# Altium PCB urbanturbine_rev5.PcbDoc
Units mm, origin at the board's own origin, x right, y up, seen from the top; angles counter-clockwise.
Board outline 101.6 x 86.99 mm, 2 copper layers (Top Layer, Bottom Layer); 52 components, 48 nets, 213 pads, 0 vias.
Unrouted connection lines stored in the file: 105.
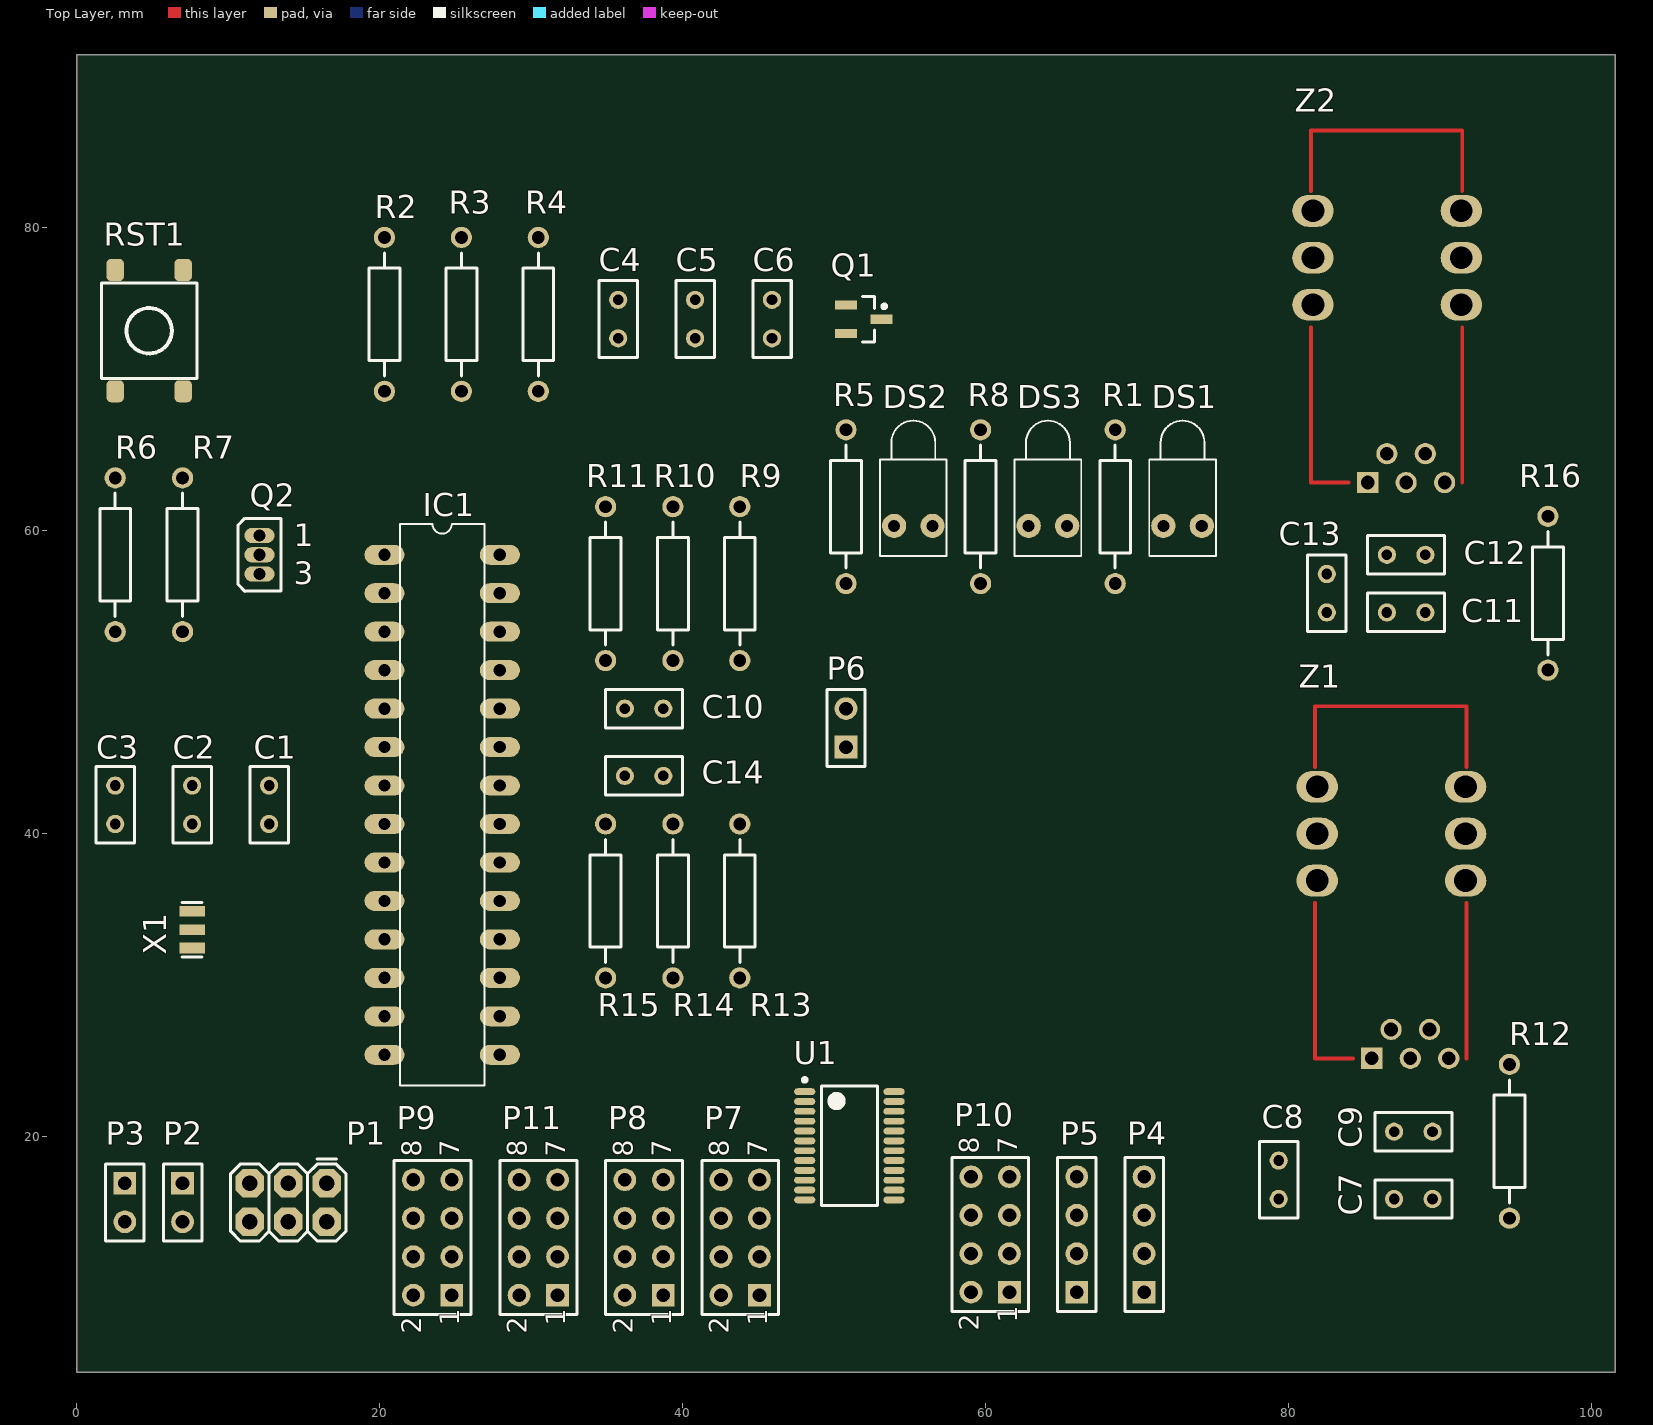
[diagram p0: Top Layer view]
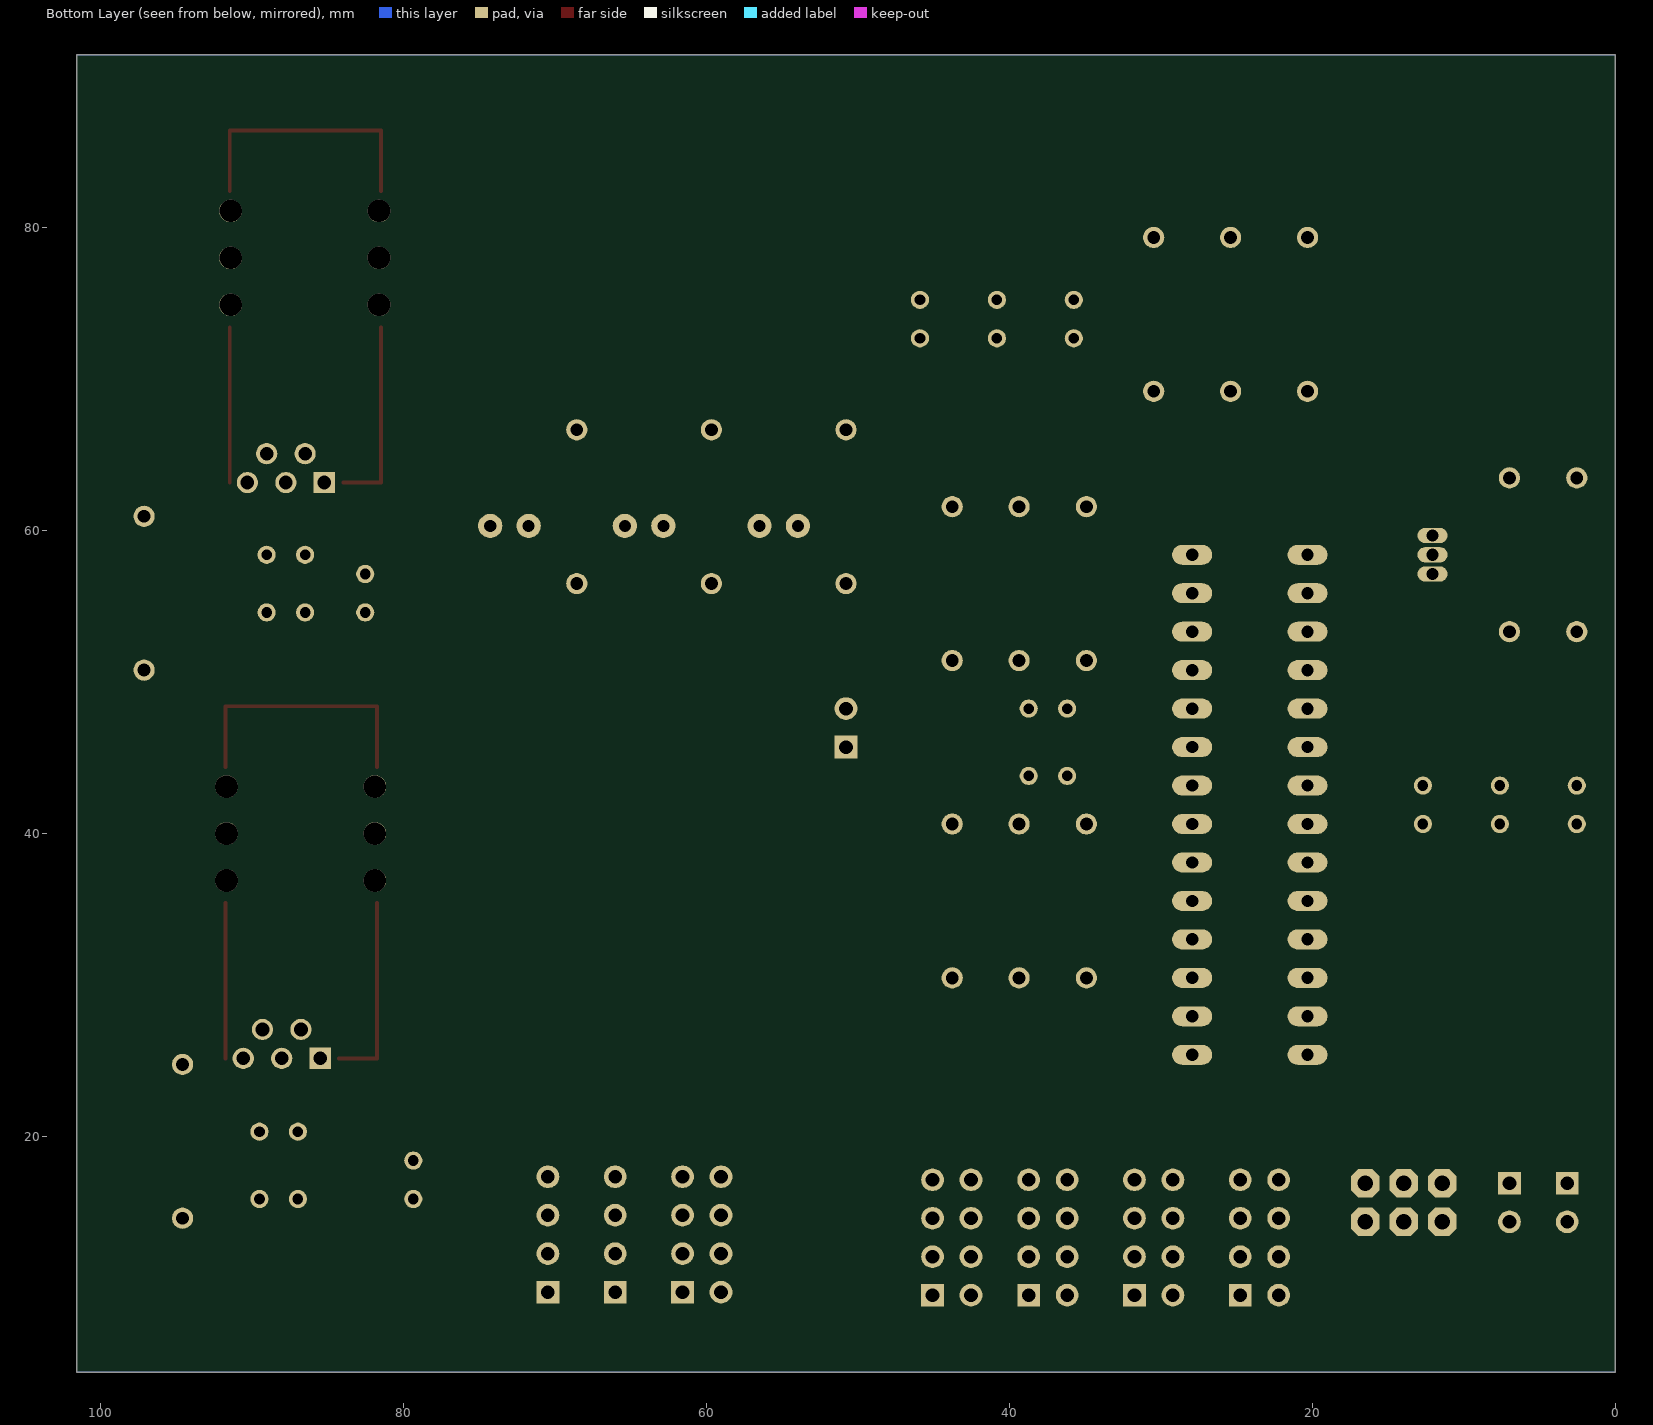
[diagram p1: Bottom Layer view, seen from below]

## Layer stack, top to bottom
Top Solder: solder mask 0.0102, Solder Resist, Dk 3.5
Top Layer: signal copper 0.0356
Dielectric 1: dielectric 0.32, FR-4, Dk 4.8
Bottom Layer: signal copper 0.0356
Bottom Solder: solder mask 0.0102, Solder Resist, Dk 3.5

## Board outline
0,4.445 101.6,4.445 101.6,91.44 0,91.44

## Design rules (kind name [scope] priority, off if disabled: settings)
Clearance [All] p1: gap=0.254 ignorepadtopadclearanceinfootprint=FALSE except(0: Arc-Hole Track-Hole SMDPad-Hole THPad-Hole Via-Hole Fill-Hole Poly-Hole Region-Hole Text-Hole)
PolygonConnect [All] p1: connectstyle=Relief reliefconductorwidth=0.254 reliefentries=4 polygonreliefangle="90 Angle" airgapwidth=0.254
RoutingVias [All] p1: holewidth=0.711 width=1.27 viastyle="Through Hole" minholewidth=0.711 minwidth=1.27 maxholewidth=0.711 maxwidth=1.27
SolderMaskExpansion [All] p1: expansion=0.102
Width [All] p1: maxlimit=0.635 minlimit=0.254 preferedwidth=0.254 minimp=50.000000 maximp=50.000000 favimp=50.000000
30 further rules are at their usual default settings.

## Classes and differential pairs
component class urbanturbine: C1 C2 C3 C4 C5 C6 DS1 DS2 DS3 IC1 P1 P2 P3 P4 P5 Q1 Q2 R1 R2 R3 R4 R5 R6 R7 R8 RST1 U1 X1
component class sensors: C7 C8 C9 C10 C11 C12 C13 C14 P6 R9 R10 R11 R12 R13 R14 R15 R16 Z1 Z2
component class displays: P7 P8 P9 P10 P11

## Components (designator, comment, footprint, x,y, rotation, side; value= is the part's Value field where it differs from the comment)
C1 "Cap Pol1" RAD-0.1 12.7,41.91 r270 top value=100pF
C2 "Cap Pol1" RAD-0.1 7.62,41.91 r270 top value=0.1uF
C3 "Cap Pol1" RAD-0.1 2.54,41.91 r270 top value=0.1uF
C4 "C1005X7R1H104K050BB" RAD-0.1 35.755,73.985 r90 top value=0.1uF
C5 "Cap" RAD-0.1 40.835,73.985 r270 top value=1uF
C6 "Cap" RAD-0.1 45.915,73.985 r270 top value=1uF
C7 "Cap" RAD-0.1 88.265,15.875 r180 top value=47uF
C8 "Cap" RAD-0.1 79.375,17.145 r90 top value=47uF
C9 "Cap" RAD-0.1 88.265,20.32 r180 top value=4.7uF
C10 "Cap" RAD-0.1 37.465,48.26 r180 top value=100nF
C11 "Cap" RAD-0.1 87.79,54.61 r180 top value=47uF
C12 "Cap" RAD-0.1 87.79,58.42 r0 top value=47uF
C13 "Cap" RAD-0.1 82.55,55.88 r270 top value=4.7uF
C14 "Cap" RAD-0.1 37.465,43.815 r180 top value=100nF
DS1 "LTST-C191KGKT" LED-1 73.025,60.325 r90 top
DS2 "LTST-C191KRKT" LED-1 55.245,60.325 r90 top
DS3 "LTST-C191KRKT" LED-1 64.135,60.325 r90 top
IC1 "ATMEGA328-PU" *DIL28 24.13,41.91 r0 top
P1 "M20-9980346" 2X3 16.51,16.91 r180 top
P2 "" HDR1X2 6.985,16.91 r270 top
P3 "" HDR1X2 3.175,16.91 r270 top
P4 "" HDR1X4 70.485,9.725 r90 top
P5 "" HDR1X4 66.04,9.725 r90 top
P6 "" HDR1X2 50.8,45.72 r90 top
P7 "" HDR2X4 45.085,9.525 r90 top
P8 "SPEED_DISP" HDR2X4 38.735,9.525 r90 top
P9 "TEMP_DISP" HDR2X4 24.765,9.525 r90 top
P10 "CRANK_DISP" HDR2X4 61.595,9.725 r90 top
P11 "HUMIDITY_DISP" HDR2X4 31.75,9.525 r90 top
Q1 "AP2138N-3.3TRG1" SOT23_M 51.975,73.975 r0 top
Q2 "MOSFET-N" E3 12.065,58.42 r0 top
R1 "RC0603JR-071KL" AXIAL-0.4 68.58,61.595 r90 top value=1k
R2 "Res1" AXIAL-0.4 20.32,74.295 r270 top value=1k
R3 "Res2" AXIAL-0.4 25.4,74.295 r90 top value=4.7k
R4 "Res2" AXIAL-0.4 30.48,74.295 r90 top value=4.7k
R5 "Res1" AXIAL-0.4 50.8,61.595 r90 top value=1k
R6 "ERJ-3EKF1002V" AXIAL-0.4 2.54,58.42 r270 top value=100
R7 "Res2" AXIAL-0.4 6.985,58.42 r270 top value=1M
R8 "Res1" AXIAL-0.4 59.69,61.595 r90 top value=1k
R9 "Res2" AXIAL-0.4 43.785,56.515 r270 top value=90k
R10 "Res2" AXIAL-0.4 39.37,56.515 r270 top value=10k
R11 "Res2" AXIAL-0.4 34.925,56.515 r90 top value=10
R12 "Res2" AXIAL-0.4 94.615,19.685 r270 top value=10k
R13 "Res2" AXIAL-0.4 43.785,35.56 r90 top value=90k
R14 "Res2" AXIAL-0.4 39.37,35.56 r90 top value=10k
R15 "Res2" AXIAL-0.4 34.925,35.56 r270 top value=10
R16 "Res2" AXIAL-0.4 97.155,55.88 r270 top value=10k
RST1 "PTS645SH50SMTR92 LFS" "TACTILE SWITCH SMD" 4.78,73.215 r90 top
U1 "TCA9548A" TCA9548A 51.025,19.39 r0 top
X1 "16MHz" RESONATOR-SMD 7.62,33.665 r90 top
Z1 "LEM HO-25P" HO-25 84.275,25.165 r90 top
Z2 "LEM HO-6P" HO-25 84,63.19 r90 top

## Footprints (in the part's own frame and the unit in brackets; to place one, negate y for a bottom-side part, rotate by r counter-clockwise, add the part's x,y. Pads: shape width x height; smd on the part's side, far side on the other; paste and mask are expansions set on the pad)
2X3 [mil] "2X3"
  oct 74x74 hole 40: 1(0,0) 2(0,100) 3(100,0) 4(100,100) 5(200,0) 6(200,100)
  silkscreen extent -50,-63 250,150, body extent -50,-49 250,149, height 335
*DIL28 [mil]
  oval 104x52 hole 32: 1(-150,650) 2(-150,550) 3(-150,450) 4(-150,350) 5(-150,250) 6(-150,150) 7(-150,50) 8(-150,-50) 9(-150,-150) 10(-150,-250) 11(-150,-350) 12(-150,-450) 13(-150,-550) 14(-150,-650) 15(150,-650) 16(150,-550) 17(150,-450) 18(150,-350) 19(150,-250) 20(150,-150) 21(150,-50) 22(150,50) 23(150,150) 24(150,250) 25(150,350) 26(150,450) 27(150,550) 28(150,650)
  silkscreen extent -110,-730 110,730, body extent -315,-730 110,730, height 314
AXIAL-0.4 [mm] "Axial Device, Thru-Hole; 2 Leads; 0.4 in Pin Spacing"
  round 1.4 hole 0.85: 1(-5.08,0) 2(5.08,0)
  silkscreen extent -4.06,-1.02 4.06,1.02
E3 [mm] "TO, Flat Index; 3 In-Line, Axial Leads; Body Dia. 4.6mm; Lead Dia. 0.5 mm (max)"
  oval 2x1 hole 0.8: 1(0,1.27) 2(0,0) 3(0,-1.27)
  silkscreen extent -1.41,-2.41 1.41,2.41
HDR1X2 [mm] "Connector; Header; 2 Position"
  rect 1.5x1.5 hole 0.9: 1(0,0)
  round 1.5 hole 0.9: 2(2.54,0)
  silkscreen extent -1.27,-1.27 3.81,1.27
HDR1X4 [mm] "Connector; Header; 4 Position"
  rect 1.5x1.5 hole 0.9: 1(0,0)
  round 1.5 hole 0.9: 2(2.54,0) 3(5.08,0) 4(7.62,0)
  silkscreen extent -1.27,-1.27 8.89,1.27
HDR2X4 [mm] "Connector; Header; 4x2 Position"
  rect 1.5x1.5 hole 0.9: 1(0,0)
  round 1.5 hole 0.9: 2(0,2.54) 3(2.54,0) 4(2.54,2.54) 5(5.08,0) 6(5.08,2.54) 7(7.62,0) 8(7.62,2.54)
  silkscreen extent -1.27,-1.27 8.89,3.81
HO-25 [mm]
  rect 1.4x1.4 / inner rect 2.5x1.4 / far side rect 1.4x1.4 hole 0.9: 1(0,-1.25)
  round 1.4 / inner oval 2.5x1.4 / far side round 1.4 hole 0.9: 2(1.905,-2.52) 3(0,-3.79) 4(1.905,-5.06) 5(0,-6.33)
  oval 2.1x2.74 / inner round 1.5 / far side round 1.5 hole 1.5: ""(11.74,-7.44) ""(11.74,2.36) ""(14.84,-7.44) ""(14.84,2.36) ""(17.94,-7.44) ""(17.94,2.36)
  Top Layer lines w0.254: 10.25,2.5 0,2.5 0,0 ; 19.25,2.5 23.25,2.5 23.25,-7.5 19.25,-7.5 ; 0,-7.5 10.25,-7.5
  body extent -0.22,-8.5 23.72,3.5, height 20.8
LED-1 [mm] "LED; 2 Leads"
  round 1.6 hole 0.8: 1(0,1.27) 2(0,-1.27)
  silkscreen extent -2,-2.2 6.95,2.2
RAD-0.1 [mm] "Radial Cap, Thru-Hole; 2 Leads; 0.1 in Pin Spacing"
  round 1.2 hole 0.7: 1(-1.27,0) 2(1.27,0)
  silkscreen extent -2.54,-1.27 2.54,1.27
RESONATOR-SMD [mil] "RESONATOR-SMD"
  rect 28x67 smd: 1(-47.62,0) 2(-0.38,0) 3(47.62,0)
  silkscreen extent -71,-26 71,26
SOT23_M [mm] "SOT23, 3-Leads, Body 2.9x1.3mm, Pitch 0.95mm, Lead Span 2.3mm - Reverse Pinning, IPC Low Density"
  rect 1.45x0.6 smd: 1(1.175,0) 2(-1.175,-0.95) 3(-1.175,0.95)
  silkscreen extent -0.1,-1.5 1.48,1.5, body extent -0.7,-1.5 0.7,1.5, height 1.1
"TACTILE SWITCH SMD" [mm] "Switch, Through-Hole, 4 Leads, Body 8.5x8.5mm, Row Spacing 9.0mm, Pitch 4.5mm"
  rrect50% 1.448x1.143 smd: 1(4.01,-2.25) 2(-4,-2.25) 3(4.01,2.24) 4(-4,2.24)
  silkscreen extent -3.16,-3.16 3.15,3.15, body extent -4.5,-3.1 4.5,3.1, height 4.5
TCA9548A [mm] "TSOP, 24-Leads, Body 7.80x4.40mm, Pitch 0.65mm, IPC Medium Density"
  oval 1.4x0.45 smd: 1(-2.95,3.575) 2(-2.95,2.925) 3(-2.95,2.275) 4(-2.95,1.625) 5(-2.95,0.975) 6(-2.95,0.325) 7(-2.95,-0.325) 8(-2.95,-0.975) 9(-2.95,-1.625) 10(-2.95,-2.275) 11(-2.95,-2.925) 12(-2.95,-3.575) 13(2.95,-3.575) 14(2.95,-2.925) 15(2.95,-2.275) 16(2.95,-1.625) 17(2.95,-0.975) 18(2.95,-0.325) 19(2.95,0.325) 20(2.95,0.975) 21(2.95,1.625) 22(2.95,2.275) 23(2.95,2.925) 24(2.95,3.575)
  silkscreen extent -3.07,-3.95 1.85,4.47, body extent -3.27,-3.96 3.28,3.93, height 1.2

## Part data
C1 C2 C3 C4: library part Cap, "Capacitor", LatestRevisionDate=17-Jul-2002, LatestRevisionNote="Re-released for DXP Platform.", PackageDescription="Radial Cap, Thru-Hole; 2 Leads; 0.3 in Pin Spacing", PackageReference=RAD-0.3, Published=8-Jun-2000, Publisher="Altium Limited"
C5 C6 C7 C8 C9 C10 C11 C12 C13 C14: "Capacitor", LatestRevisionDate=17-Jul-2002, LatestRevisionNote="Re-released for DXP Platform.", PackageDescription="Radial Cap, Thru-Hole; 2 Leads; 0.3 in Pin Spacing", PackageReference=RAD-0.3, Published=8-Jun-2000, Publisher="Altium Limited"
DS1 DS2 DS3: library part LED1, "Typical RED GaAs LED", LatestRevisionDate=08-Jul-2005, LatestRevisionNote="Mech Layer 1 removed.", PackageDescription="LED; 2 Leads", PackageReference=LED-1, Published=8-Jun-2000, Publisher="Altium Limited"
IC1: "IC MCU 8BIT 32KB FLASH 28DIP", Package="DIP-28 Microchip Technology", Availability=Unavailable, MF="Microchip Technology", MP=ATMEGA328-PU, Price=None, SnapEDA_Link=https://www.snapeda.com/parts/ATMEGA328-PU/Microchip/view-part/?ref=snap
P1: "DIL VERTICAL PC TAIL PIN HEADER", Color=Black, Manufacturer="Harwin Inc.", Supplier Part Number 1=952-2121-ND, Category="Connectors, Interconnects", ComponentLink1Description=http://cdn.harwin.com/pdfs/M20-998.pdf, ComponentLink1URL=http://cdn.harwin.com/pdfs/M20-998.pdf, Connector Type="Header, Unshrouded, Breakaway", Contact Finish=Tin, Contact Finish Thickness=-, Contact Mating Length="0.240\" (6.10mm)", Contact Type="Male Pin", Fastening Type=-, Features=-, Manufacturer Part Number=M20-9980346, Mounting Type="Through Hole", Number of Positions=6, Number of Positions Loaded=All, Number of Rows=2, Packaging=Bulk, Pitch="0.100\" (2.54mm)", Pricing 1="1=0.32, 10=0.299, 25=0.2552, 50=0.2232, 100=0.2072, 250=0.18336, 500=0.17534, 1000=0.14346, 2500=0.13151 (CAD)", RoHS="RoHS Compliant", Row Spacing="0.100\" (2.54mm)", Stock 1=14297, Supplier 1=Digi-Key, Termination=Solder
P2 P3 P6: library part "Header 2", "Header, 2-Pin", LatestRevisionDate=17-Jul-2002, LatestRevisionNote="Re-released for DXP Platform.", Publisher="Altium Limited"
P4 P5: library part "Header 4", "Header, 4-Pin", LatestRevisionDate=17-Jul-2002, LatestRevisionNote="Re-released for DXP Platform.", Publisher="Altium Limited"
P7 P8 P9 P10 P11: library part "Header 4X2", "Header, 4-Pin, Dual row", LatestRevisionDate=17-Jul-2002, LatestRevisionNote="Re-released for DXP Platform.", Publisher="Altium Limited"
Q1: "IC REG LINEAR 3.3V 250MA SOT23-3"
Q2: "N-Channel MOSFET", LatestRevisionDate=17-Jul-2002, LatestRevisionNote="Re-released for DXP Platform.", PackageDescription="TO, Flat Index; 3 In-Line, Axial Leads; Body Dia. 4.6mm; Lead Dia. 0.5 mm (max)", PackageReference=E3, PackageVersion=1995/1996, Published=8-Jun-2000, Publisher="Altium Limited"
R1 R2 R5 R6 R8: library part Res2, "Resistor", LatestRevisionDate=17-Jul-2002, LatestRevisionNote="Re-released for DXP Platform.", PackageDescription="Axial Device, Thru-Hole; 2 Leads; 0.4 in Pin Spacing", PackageReference=AXIAL-0.4, Published=8-Jun-2000, Publisher="Altium Limited"
R3 R4 R7 R9 R10 R11 R12 R13 R14 R15 R16: "Resistor", LatestRevisionDate=17-Jul-2002, LatestRevisionNote="Re-released for DXP Platform.", PackageDescription="Axial Device, Thru-Hole; 2 Leads; 0.4 in Pin Spacing", PackageReference=AXIAL-0.4, Published=8-Jun-2000, Publisher="Altium Limited"
RST1: "SWITCH TACTILE SPST-NO 0.05A 12V", Contact Rating @ Voltage="0.05A @ 12VDC", Illumination Type, Color=-, Manufacturer="C&K Components", Operating Force=200gf, Operating Temperature="-20°C ~ 60°C", Supplier Part Number 1=CKN9085CT-ND, Actuator Height off PCB, from Pins=5.00mm, Actuator Material="Polyamide (PA66), Nylon 6/6", Actuator Orientation="Top Actuated", Actuator Type=Standard, Category=Switches, Circuit=SPST-NO, ComponentLink1Description=http://www.ck-components.com/14409/pts645_25apr13.pdf/, ComponentLink1URL=http://www.ck-components.com/14409/pts645_25apr13.pdf/, Features=-, Illumination=Non-Illuminated, Illumination Voltage (Nominal)=-, Ingress Protection=-, Manufacturer Part Number="PTS645SH50SMTR92 LFS", Mechanical Life="100,000 Cycles", Mounting Type="Surface Mount", Outline="6.00mm x 6.00mm", Packaging="Cut Tape (CT)", Pricing 1="1=0.43, 10=0.418, 25=0.404, 50=0.3892, 100=0.3675, 250=0.34592, 500=0.3315 (CAD)", RoHS="RoHS Compliant", Stock 1=49163, Supplier 1=Digi-Key, Switch Function=Off-Mom, Switch Travel=-, Termination Style="Gull Wing"
U1: "IIC multiplexor"
X1: library part CSTNE16M0VH3C000R0, "CER RESONATOR 16MHZ SMD", Capacitance=33pF, Frequency=10MHz, Frequency Stability=±0.2%, Frequency Tolerance=±0.5%, Manufacturer="Murata Electronics North America", Manufacturer Part Number=CSTCE10M0G55Z-R0, Operating Temperature="-40°C ~ 125°C", Package / Case="3-SMD, Non-Standard", Supplier Part Number 1=490-4715-1-ND, Category="Crystals and Oscillators", ComponentLink1Description=http://www.murata.com/~/media/webrenewal/support/library/catalog/products/timingdevice/ceralock/p16e.ashx, ComponentLink1URL=http://www.murata.com/~/media/webrenewal/support/library/catalog/products/timingdevice/ceralock/p16e.ashx, Features="Built in Capacitor", Height="0.031\" (0.80mm)", Impedance=-, Mounting Type="Surface Mount", Packaging="Cut Tape (CT)", Pricing 1="1=0.69, 10=0.573, 50=0.5166, 100=0.4596, 500=0.43548, 1000=0.36763 (CAD)", RoHS="RoHS Compliant", Size / Dimension="0.126\" L x 0.051\" W (3.20mm x 1.30mm)", Stock 1=14995, Supplier 1=Digi-Key, Type=Ceramic
Z1: "Hall Effect Current Sensor"
Z2: library part "LEM HO-25P", "Hall Effect Current Sensor"

## Nets (pads, with @x,y where several pads share a name; then routed paths per layer and width w, separated by ;. In a path a pad name is that pad's centre, name@x,y a point inside that pad or via, vN(x,y) a via of type N, cw(c..) or ccw(c..) an arc to the next point about the centre after c; other vN are vias at no path point)
3.3V: C6.2 P4.1 Q1.2
+5: C1.1 C2.1 C3.1 C5.2 C8.2 C12.2 DS1.1 IC1.7 IC1.20 P1.2 P2.1 P5.1 P7.2 P8.2 P9.2 P10.2 P11.2 Q1.1 R2.1 R3.2 R4.2 R12.2 R16.2 U1.24 Z1.1 Z2.1
BME_C: P5.2 U1.16
BME_D: P5.3 U1.15
COMP_IN: IC1.4 P3.1
CRANK_C: P10.4 U1.14
CRANK_CURRENT: C13.1 IC1.25 Z2.3
CRANK_D: P10.6 P10.8 U1.13
CRANK_IN_+: P6.2 R9.2
CRANK_VOLTAGE: C10.2 IC1.23 R11.1
DISPLAY_GND: P7.1 P7.3 P8.1 P8.3 P9.1 P9.3 P10.1 P10.3 P11.1 P11.3 Q2.1
DISPLAY_RES: IC1.14 P7.7 P8.7 P9.7 P10.7 P11.7
DISPLAY_TOGGLE: IC1.6 R6.2
GND: C1.2 C2.2 C3.2 C4.2 C5.1 C6.1 C7.2 C8.1 C9.2 C10.1 C11.2 C12.1 C13.2 C14.1 DS2.2 DS3.2 IC1.3 IC1.8 IC1.11 IC1.12 IC1.13 IC1.15 IC1.16 IC1.22 P1.6 P2.2 P3.2 P4.4 P5.4 Q1.3 Q2.3 R1.2 R7.2 R10.2 R14.2 RST1.1 RST1.2 U1.1 U1.2 U1.12 U1.21 X1.2 Z1.2 Z2.2
HUMIDITY_C: P11.4 U1.7
HUMIDITY_D: P11.6 P11.8 U1.6
MISO: IC1.18 P1.1
MOSI: IC1.17 P1.4
MUX_RST: IC1.5 U1.3
NetC4_1: C4.1 IC1.21
NetC7_1: C7.1 Z1.4
NetC11_1: C11.1 Z2.4
NetDS1_2: DS1.2 R1.1
NetDS2_1: DS2.1 R5.2
NetDS3_1: DS3.1 R8.2
NetIC1_2: IC1.2 R8.1
NetIC1_9: IC1.9 X1.3
NetIC1_10: IC1.10 X1.1
NetQ2_2: Q2.2 R6.1 R7.1
NetR9_1: R9.1 R10.1 R11.2
NetR12_1: R12.1 Z1.5
NetR13_1: R13.1 R14.1 R15.2
NetR16_1: R16.1 Z2.5
PROX_C: P4.2 U1.18
PROX_D: P4.3 U1.17
RST: IC1.1 P1.5 R2.2 RST1.3 RST1.4
SCK: IC1.19 P1.3 R5.1
SCL: IC1.28 R4.1 U1.22
SDA: IC1.27 R3.1 U1.23
SPEED_C: P8.4 U1.9
SPEED_D: P8.6 P8.8 U1.8
TEMP_C: P9.4 U1.5
TEMP_D: P9.6 P9.8 U1.4
TURBINE_C: P7.4 U1.11
TURBINE_CURRENT: C9.1 IC1.26 Z1.3
TURBINE_D: P7.6 P7.8 U1.10
TURBINE_IN_+: P6.1 R13.2
TURBINE_VOLTAGE: C14.2 IC1.24 R15.1
pads on no net: P7.5 P8.5 P9.5 P10.5 P11.5 U1.19 U1.20 Z1. Z2.

## Polygon pours and split planes (outlines as drawn)
GND on Top Layer "Top Layer-No Net" (solid, shelved, pour order 8): 0,4.445 101.6,4.445 101.6,91.44 0,91.44
GND on Bottom Layer "Top Layer-No Net1" (solid, shelved, pour order 9): 0,4.445 101.6,4.445 101.6,91.44 0,91.44

## Silkscreen, mask and mechanical layers (free items; w line width, h text height)
Mechanical 13:
  the board outline again, w0.254

## Text inside footprints (layer, text, board x,y; h text height)
P7: Top Overlay "2" at 43.053,6.985 h1.27 r90; Top Overlay "1" at 45.593,7.493 h1.27 r90; Top Overlay "7" at 45.593,18.669 h1.27 r90; Top Overlay "8" at 43.053,18.669 h1.27 r90
P8: Top Overlay "2" at 36.703,6.985 h1.27 r90; Top Overlay "1" at 39.243,7.493 h1.27 r90; Top Overlay "7" at 39.243,18.669 h1.27 r90; Top Overlay "8" at 36.703,18.669 h1.27 r90
P9: Top Overlay "2" at 22.733,6.985 h1.27 r90; Top Overlay "1" at 25.273,7.493 h1.27 r90; Top Overlay "7" at 25.273,18.669 h1.27 r90; Top Overlay "8" at 22.733,18.669 h1.27 r90
P10: Top Overlay "2" at 59.563,7.185 h1.27 r90; Top Overlay "1" at 62.103,7.693 h1.27 r90; Top Overlay "7" at 62.103,18.869 h1.27 r90; Top Overlay "8" at 59.563,18.869 h1.27 r90
P11: Top Overlay "2" at 29.718,6.985 h1.27 r90; Top Overlay "1" at 32.258,7.493 h1.27 r90; Top Overlay "7" at 32.258,18.669 h1.27 r90; Top Overlay "8" at 29.718,18.669 h1.27 r90
Q2: Top Overlay "1" at 14.34,58.975 h1.5; Top Overlay "3" at 14.34,56.457 h1.5